# Altium PCB Slot.PcbDoc (part 2 of 4)
Units mm, origin at the board's own origin, x right, y up, seen from the top; angles counter-clockwise.
Board outline 152.4 x 101.6 mm, 2 copper layers (Top Layer, Bottom Layer); 34 components, 37 nets, 230 pads, 62 vias.
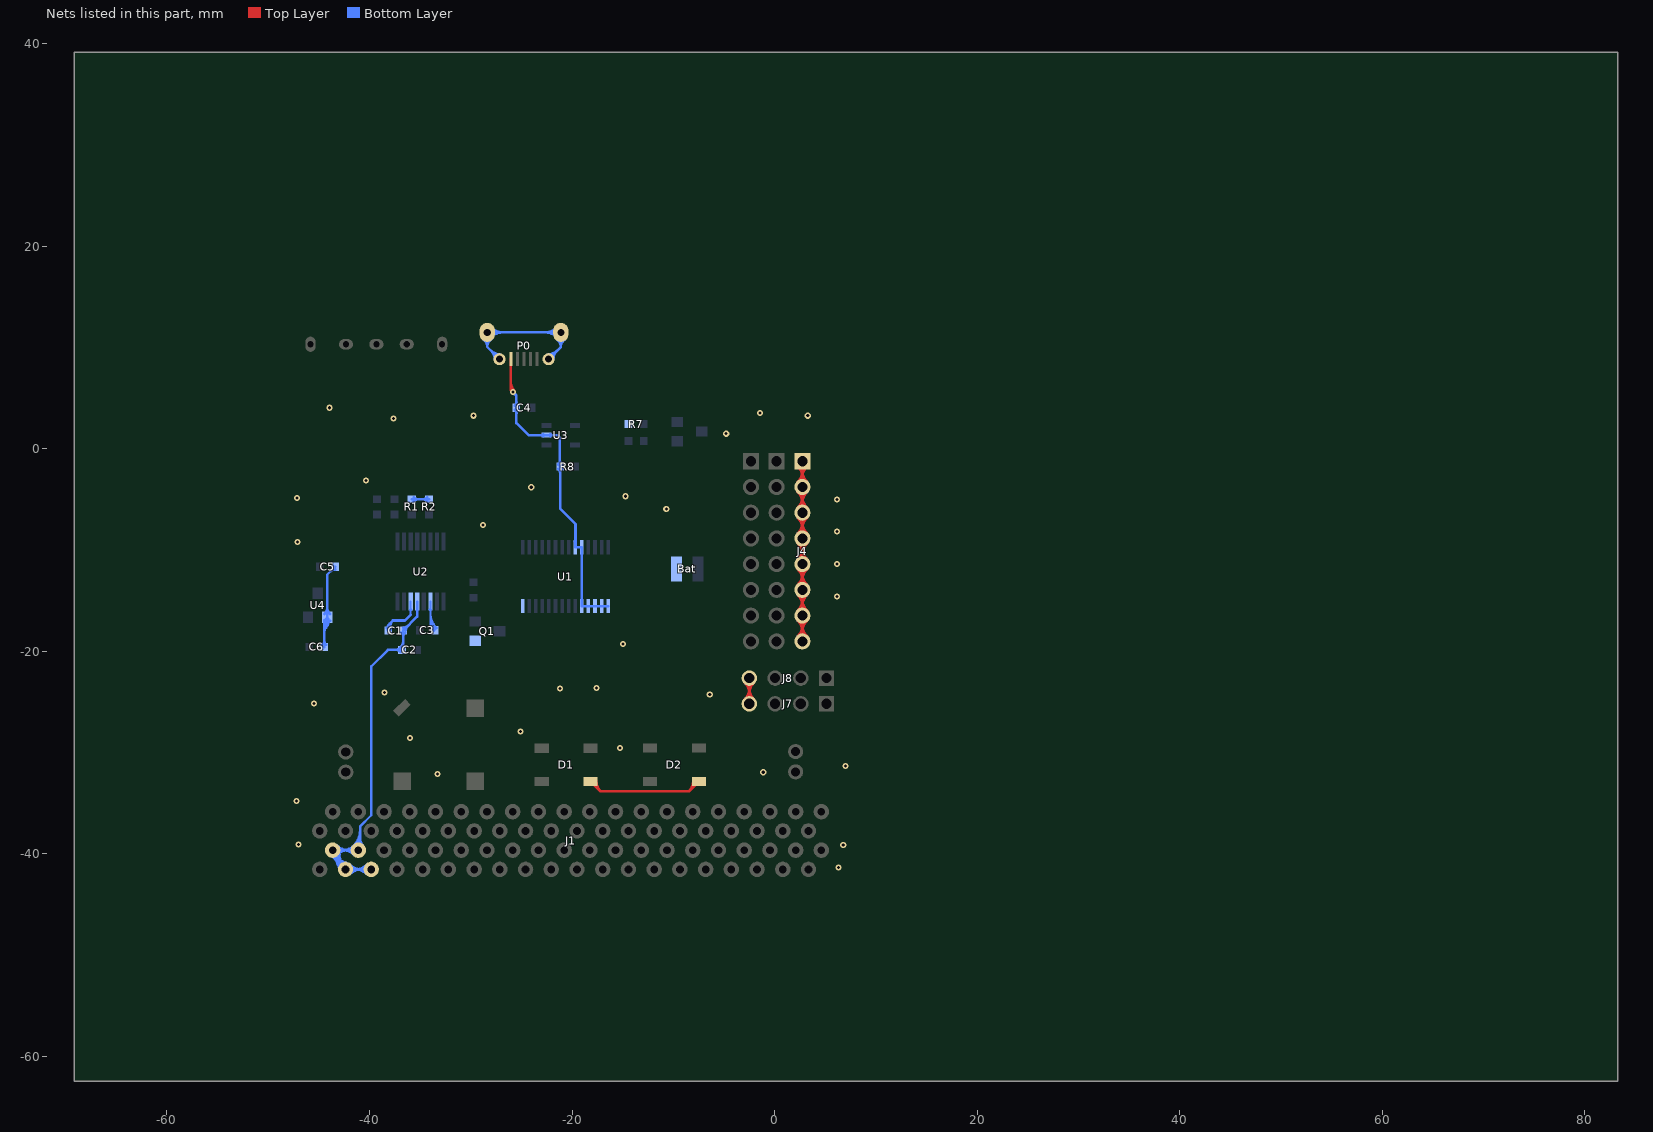
[diagram p2: the nets of this part, all layers, seen from the top]

## Via types
v1: diameter 0.6, hole 0.3, Top Layer to Bottom Layer, 62 vias

## Nets (pads, with @x,y where several pads share a name; then routed paths per layer and width w, separated by ;. In a path a pad name is that pad's centre, name@x,y a point inside that pad or via, vN(x,y) a via of type N, cw(c..) or ccw(c..) an arc to the next point about the centre after c; other vN are vias at no path point) (continued)
GND: Bat.2 C1.2 C2.1 C4.1 C5.1 C6.1 D1.3 D2.3 J1.71 J1.73 J1.75 J1.77 J4.1 J4.2 J4.3 J4.4 J4.5 J4.6 J4.7 J4.8 J7.4 J8.4 P0.5 P0.6 Q1.1 R1.2 R2.2 R7.1 R8.1 U1.1 U1.2 U1.3 U1.4 U1.5 U1.14 U1.23 U1.24 U2.13 U3.2 U4.1 | length 579.2
  Top Layer w0.254: P0.5@-26.035,8.865 -26.035,5.817 v1(-25.832,5.613) ; D1.3@-18.166,-32.835 -17.193,-33.807 ; D2.3@-7.472,-32.824 -8.456,-33.807 -17.193,-33.807 ; J7.4@-2.492,-25.171 J8.4@-2.492,-22.631 ; J4.8@2.743,-18.999 J4.7@2.743,-16.459 J4.6@2.743,-13.919 J4.5@2.743,-11.379 J4.4@2.743,-8.839 J4.3@2.743,-6.299 J4.2@2.743,-3.759 J4.1@2.743,-1.219 ; -26.035,5.908 ccw(c-25.537,5.908) v1@-25.889,5.556 ; -26.035,5.908 ccw(c-25.537,5.908) v1@-25.889,5.556 ; -26.035,5.908 ccw(c-25.537,5.908) v1@-25.889,5.556 ; -26.035,6.522 ccw(c-24.924,6.522) v1@-25.709,5.736 ; -26.035,6.522 ccw(c-24.924,6.522) v1@-25.709,5.736 ; -26.035,6.522 ccw(c-24.924,6.522) v1@-25.709,5.736 ; v1@-25.972,5.715 ccw(c-26.295,5.95) -25.949,6.15 ; v1@-25.972,5.715 ccw(c-26.295,5.95) -25.949,6.15 ; v1@-25.972,5.715 ccw(c-26.295,5.95) -25.949,6.15 ; D1.3@-17.944,-32.898 cw(c-18.35,-33.782) -17.409,-33.535 ; D1.3@-17.944,-32.898 cw(c-18.35,-33.782) -17.409,-33.535 ; D1.3@-17.944,-32.898 cw(c-18.35,-33.782) -17.409,-33.535 ; D1.3@-17.847,-32.835 ccw(c-17.086,-32.839) -17.624,-33.377 ; D1.3@-17.847,-32.835 ccw(c-17.086,-32.839) -17.624,-33.377 ; D1.3@-17.847,-32.835 ccw(c-17.086,-32.839) -17.624,-33.377 ; D1.3@-17.593,-32.837 ccw(c-16.229,-32.843) -17.193,-33.807 ; D1.3@-17.593,-32.837 ccw(c-16.229,-32.843) -17.193,-33.807 ; D1.3@-17.593,-32.837 ccw(c-16.229,-32.843) -17.193,-33.807 ; -8.45,-33.802 ccw(c-9.429,-32.824) D2.3@-8.045,-32.824 ; -8.45,-33.802 ccw(c-9.429,-32.824) D2.3@-8.045,-32.824 ; -8.45,-33.802 ccw(c-9.429,-32.824) D2.3@-8.045,-32.824 ; -8.232,-33.52 cw(c-7.295,-33.771) D2.3@-7.694,-32.887 ; -8.232,-33.52 cw(c-7.295,-33.771) D2.3@-7.694,-32.887 ; -8.232,-33.52 cw(c-7.295,-33.771) D2.3@-7.694,-32.887 ; -8.017,-33.369 ccw(c-8.561,-32.824) D2.3@-7.791,-32.824 ; -8.017,-33.369 ccw(c-8.561,-32.824) D2.3@-7.791,-32.824 ; -8.017,-33.369 ccw(c-8.561,-32.824) D2.3@-7.791,-32.824 ; J7.4@-2.941,-24.722 ccw(c-4.025,-23.638) -2.492,-23.638 ; J7.4@-2.941,-24.722 ccw(c-4.025,-23.638) -2.492,-23.638 ; J7.4@-2.941,-24.722 ccw(c-4.025,-23.638) -2.492,-23.638 ; J8.4@-2.941,-23.08 cw(c-4.025,-24.164) -2.492,-24.164 ; J8.4@-2.941,-23.08 cw(c-4.025,-24.164) -2.492,-24.164 ; J8.4@-2.941,-23.08 cw(c-4.025,-24.164) -2.492,-24.164 ; J7.4@-2.761,-24.902 ccw(c-3.411,-24.252) -2.492,-24.252 ; J7.4@-2.761,-24.902 ccw(c-3.411,-24.252) -2.492,-24.252 ; J7.4@-2.761,-24.902 ccw(c-3.411,-24.252) -2.492,-24.252 ; J8.4@-2.761,-22.901 cw(c-3.411,-23.551) -2.492,-23.551 ; J8.4@-2.761,-22.901 cw(c-3.411,-23.551) -2.492,-23.551 ; J8.4@-2.761,-22.901 cw(c-3.411,-23.551) -2.492,-23.551 ; -2.492,-24.252 ccw(c-1.572,-24.252) J7.4@-2.222,-24.902 ; -2.492,-24.252 ccw(c-1.572,-24.252) J7.4@-2.222,-24.902 ; -2.492,-24.252 ccw(c-1.572,-24.252) J7.4@-2.222,-24.902 ; -2.492,-24.164 cw(c-0.959,-24.164) J8.4@-2.043,-23.08 ; -2.492,-24.164 cw(c-0.959,-24.164) J8.4@-2.043,-23.08 ; -2.492,-24.164 cw(c-0.959,-24.164) J8.4@-2.043,-23.08 ; -2.492,-23.638 ccw(c-0.959,-23.638) J7.4@-2.043,-24.722 ; -2.492,-23.638 ccw(c-0.959,-23.638) J7.4@-2.043,-24.722 ; -2.492,-23.638 ccw(c-0.959,-23.638) J7.4@-2.043,-24.722 ; -2.492,-23.551 cw(c-1.572,-23.551) J8.4@-2.222,-22.901 ; -2.492,-23.551 cw(c-1.572,-23.551) J8.4@-2.222,-22.901 ; -2.492,-23.551 cw(c-1.572,-23.551) J8.4@-2.222,-22.901 ; J4.8@2.267,-18.523 ccw(c1.118,-17.374) 2.743,-17.374 ; J4.8@2.267,-18.523 ccw(c1.118,-17.374) 2.743,-17.374 ; J4.8@2.267,-18.523 ccw(c1.118,-17.374) 2.743,-17.374 ; J4.7@2.267,-16.935 cw(c1.118,-18.084) 2.743,-18.084 ; J4.7@2.267,-16.935 cw(c1.118,-18.084) 2.743,-18.084 ; J4.7@2.267,-16.935 cw(c1.118,-18.084) 2.743,-18.084 ; J4.7@2.267,-15.983 ccw(c1.118,-14.834) 2.743,-14.834 ; J4.7@2.267,-15.983 ccw(c1.118,-14.834) 2.743,-14.834 ; J4.7@2.267,-15.983 ccw(c1.118,-14.834) 2.743,-14.834 ; J4.6@2.267,-14.395 cw(c1.118,-15.544) 2.743,-15.544 ; J4.6@2.267,-14.395 cw(c1.118,-15.544) 2.743,-15.544 ; J4.6@2.267,-14.395 cw(c1.118,-15.544) 2.743,-15.544 ; J4.6@2.267,-13.443 ccw(c1.118,-12.294) 2.743,-12.294 ; J4.6@2.267,-13.443 ccw(c1.118,-12.294) 2.743,-12.294 ; J4.6@2.267,-13.443 ccw(c1.118,-12.294) 2.743,-12.294 ; J4.5@2.267,-11.855 cw(c1.118,-13.004) 2.743,-13.004 ; J4.5@2.267,-11.855 cw(c1.118,-13.004) 2.743,-13.004 ; J4.5@2.267,-11.855 cw(c1.118,-13.004) 2.743,-13.004 ; J4.5@2.267,-10.903 ccw(c1.118,-9.754) 2.743,-9.754 ; J4.5@2.267,-10.903 ccw(c1.118,-9.754) 2.743,-9.754 ; J4.5@2.267,-10.903 ccw(c1.118,-9.754) 2.743,-9.754 ; J4.4@2.267,-9.315 cw(c1.118,-10.464) 2.743,-10.464 ; J4.4@2.267,-9.315 cw(c1.118,-10.464) 2.743,-10.464 ; J4.4@2.267,-9.315 cw(c1.118,-10.464) 2.743,-10.464 ; J4.4@2.267,-8.363 ccw(c1.118,-7.214) 2.743,-7.214 ; J4.4@2.267,-8.363 ccw(c1.118,-7.214) 2.743,-7.214 ; J4.4@2.267,-8.363 ccw(c1.118,-7.214) 2.743,-7.214 ; J4.3@2.267,-6.775 cw(c1.118,-7.924) 2.743,-7.924 ; J4.3@2.267,-6.775 cw(c1.118,-7.924) 2.743,-7.924 ; J4.3@2.267,-6.775 cw(c1.118,-7.924) 2.743,-7.924 ; J4.3@2.267,-5.823 ccw(c1.118,-4.674) 2.743,-4.674 ; J4.3@2.267,-5.823 ccw(c1.118,-4.674) 2.743,-4.674 ; J4.3@2.267,-5.823 ccw(c1.118,-4.674) 2.743,-4.674 ; J4.2@2.267,-4.235 cw(c1.118,-5.384) 2.743,-5.384 ; J4.2@2.267,-4.235 cw(c1.118,-5.384) 2.743,-5.384 ; J4.2@2.267,-4.235 cw(c1.118,-5.384) 2.743,-5.384 ; J4.2@2.267,-3.283 ccw(c1.118,-2.134) 2.743,-2.134 ; J4.2@2.267,-3.283 ccw(c1.118,-2.134) 2.743,-2.134 ; J4.2@2.267,-3.283 ccw(c1.118,-2.134) 2.743,-2.134 ; J4.1@2.267,-1.695 cw(c1.118,-2.844) 2.743,-2.844 ; J4.1@2.267,-1.695 cw(c1.118,-2.844) 2.743,-2.844 ; J4.1@2.267,-1.695 cw(c1.118,-2.844) 2.743,-2.844 ; J4.8@2.447,-18.703 ccw(c1.732,-17.988) 2.743,-17.988 ; J4.8@2.447,-18.703 ccw(c1.732,-17.988) 2.743,-17.988 ; J4.8@2.447,-18.703 ccw(c1.732,-17.988) 2.743,-17.988 ; J4.7@2.447,-16.755 cw(c1.732,-17.471) 2.743,-17.471 ; J4.7@2.447,-16.755 cw(c1.732,-17.471) 2.743,-17.471 ; J4.7@2.447,-16.755 cw(c1.732,-17.471) 2.743,-17.471 ; J4.7@2.447,-16.163 ccw(c1.732,-15.448) 2.743,-15.448 ; J4.7@2.447,-16.163 ccw(c1.732,-15.448) 2.743,-15.448 ; J4.7@2.447,-16.163 ccw(c1.732,-15.448) 2.743,-15.448 ; J4.6@2.447,-14.215 cw(c1.732,-14.931) 2.743,-14.931 ; J4.6@2.447,-14.215 cw(c1.732,-14.931) 2.743,-14.931 ; J4.6@2.447,-14.215 cw(c1.732,-14.931) 2.743,-14.931 ; J4.6@2.447,-13.623 ccw(c1.732,-12.908) 2.743,-12.908 ; J4.6@2.447,-13.623 ccw(c1.732,-12.908) 2.743,-12.908 ; J4.6@2.447,-13.623 ccw(c1.732,-12.908) 2.743,-12.908 ; J4.5@2.447,-11.675 cw(c1.732,-12.391) 2.743,-12.391 ; J4.5@2.447,-11.675 cw(c1.732,-12.391) 2.743,-12.391 ; J4.5@2.447,-11.675 cw(c1.732,-12.391) 2.743,-12.391 ; J4.5@2.447,-11.083 ccw(c1.732,-10.368) 2.743,-10.368 ; J4.5@2.447,-11.083 ccw(c1.732,-10.368) 2.743,-10.368 ; J4.5@2.447,-11.083 ccw(c1.732,-10.368) 2.743,-10.368 ; J4.4@2.447,-9.135 cw(c1.732,-9.851) 2.743,-9.851 ; J4.4@2.447,-9.135 cw(c1.732,-9.851) 2.743,-9.851 ; J4.4@2.447,-9.135 cw(c1.732,-9.851) 2.743,-9.851 ; J4.4@2.447,-8.543 ccw(c1.732,-7.828) 2.743,-7.828 ; J4.4@2.447,-8.543 ccw(c1.732,-7.828) 2.743,-7.828 ; J4.4@2.447,-8.543 ccw(c1.732,-7.828) 2.743,-7.828 ; J4.3@2.447,-6.595 cw(c1.732,-7.311) 2.743,-7.311 ; J4.3@2.447,-6.595 cw(c1.732,-7.311) 2.743,-7.311 ; J4.3@2.447,-6.595 cw(c1.732,-7.311) 2.743,-7.311 ; J4.3@2.447,-6.003 ccw(c1.732,-5.288) 2.743,-5.288 ; J4.3@2.447,-6.003 ccw(c1.732,-5.288) 2.743,-5.288 ; J4.3@2.447,-6.003 ccw(c1.732,-5.288) 2.743,-5.288 ; J4.2@2.447,-4.055 cw(c1.732,-4.771) 2.743,-4.771 ; J4.2@2.447,-4.055 cw(c1.732,-4.771) 2.743,-4.771 ; J4.2@2.447,-4.055 cw(c1.732,-4.771) 2.743,-4.771 ; J4.2@2.447,-3.463 ccw(c1.732,-2.748) 2.743,-2.748 ; J4.2@2.447,-3.463 ccw(c1.732,-2.748) 2.743,-2.748 ; J4.2@2.447,-3.463 ccw(c1.732,-2.748) 2.743,-2.748 ; J4.1@2.447,-1.515 cw(c1.732,-2.231) 2.743,-2.231 ; J4.1@2.447,-1.515 cw(c1.732,-2.231) 2.743,-2.231 ; J4.1@2.447,-1.515 cw(c1.732,-2.231) 2.743,-2.231 ; 2.743,-18.084 cw(c4.368,-18.084) J4.7@3.219,-16.935 ; 2.743,-18.084 cw(c4.368,-18.084) J4.7@3.219,-16.935 ; 2.743,-18.084 cw(c4.368,-18.084) J4.7@3.219,-16.935 ; 2.743,-17.988 ccw(c3.755,-17.988) J4.8@3.039,-18.703 ; 2.743,-17.988 ccw(c3.755,-17.988) J4.8@3.039,-18.703 ; 2.743,-17.988 ccw(c3.755,-17.988) J4.8@3.039,-18.703 ; 2.743,-17.471 cw(c3.755,-17.471) J4.7@3.039,-16.755 ; 2.743,-17.471 cw(c3.755,-17.471) J4.7@3.039,-16.755 ; 2.743,-17.471 cw(c3.755,-17.471) J4.7@3.039,-16.755 ; 2.743,-17.374 ccw(c4.368,-17.374) J4.8@3.219,-18.523 ; 2.743,-17.374 ccw(c4.368,-17.374) J4.8@3.219,-18.523 ; 2.743,-17.374 ccw(c4.368,-17.374) J4.8@3.219,-18.523 ; 2.743,-15.544 cw(c4.368,-15.544) J4.6@3.219,-14.395 ; 2.743,-15.544 cw(c4.368,-15.544) J4.6@3.219,-14.395 ; 2.743,-15.544 cw(c4.368,-15.544) J4.6@3.219,-14.395 ; 2.743,-15.448 ccw(c3.755,-15.448) J4.7@3.039,-16.163 ; 2.743,-15.448 ccw(c3.755,-15.448) J4.7@3.039,-16.163 ; 2.743,-15.448 ccw(c3.755,-15.448) J4.7@3.039,-16.163 ; 2.743,-14.931 cw(c3.755,-14.931) J4.6@3.039,-14.215 ; 2.743,-14.931 cw(c3.755,-14.931) J4.6@3.039,-14.215 ; 2.743,-14.931 cw(c3.755,-14.931) J4.6@3.039,-14.215 ; 2.743,-14.834 ccw(c4.368,-14.834) J4.7@3.219,-15.983 ; 2.743,-14.834 ccw(c4.368,-14.834) J4.7@3.219,-15.983 ; 2.743,-14.834 ccw(c4.368,-14.834) J4.7@3.219,-15.983 ; 2.743,-13.004 cw(c4.368,-13.004) J4.5@3.219,-11.855 ; 2.743,-13.004 cw(c4.368,-13.004) J4.5@3.219,-11.855 ; 2.743,-13.004 cw(c4.368,-13.004) J4.5@3.219,-11.855 ; 2.743,-12.908 ccw(c3.755,-12.908) J4.6@3.039,-13.623 ; 2.743,-12.908 ccw(c3.755,-12.908) J4.6@3.039,-13.623 ; 2.743,-12.908 ccw(c3.755,-12.908) J4.6@3.039,-13.623 ; 2.743,-12.391 cw(c3.755,-12.391) J4.5@3.039,-11.675 ; 2.743,-12.391 cw(c3.755,-12.391) J4.5@3.039,-11.675 ; 2.743,-12.391 cw(c3.755,-12.391) J4.5@3.039,-11.675 ; 2.743,-12.294 ccw(c4.368,-12.294) J4.6@3.219,-13.443 ; 2.743,-12.294 ccw(c4.368,-12.294) J4.6@3.219,-13.443 ; 2.743,-12.294 ccw(c4.368,-12.294) J4.6@3.219,-13.443 ; 2.743,-10.464 cw(c4.368,-10.464) J4.4@3.219,-9.315 ; 2.743,-10.464 cw(c4.368,-10.464) J4.4@3.219,-9.315 ; 2.743,-10.464 cw(c4.368,-10.464) J4.4@3.219,-9.315 ; 2.743,-10.368 ccw(c3.755,-10.368) J4.5@3.039,-11.083 ; 2.743,-10.368 ccw(c3.755,-10.368) J4.5@3.039,-11.083 ; 2.743,-10.368 ccw(c3.755,-10.368) J4.5@3.039,-11.083 ; 2.743,-9.851 cw(c3.755,-9.851) J4.4@3.039,-9.135 ; 2.743,-9.851 cw(c3.755,-9.851) J4.4@3.039,-9.135 ; 2.743,-9.851 cw(c3.755,-9.851) J4.4@3.039,-9.135 ; 2.743,-9.754 ccw(c4.368,-9.754) J4.5@3.219,-10.903 ; 2.743,-9.754 ccw(c4.368,-9.754) J4.5@3.219,-10.903 ; 2.743,-9.754 ccw(c4.368,-9.754) J4.5@3.219,-10.903 ; 2.743,-7.924 cw(c4.368,-7.924) J4.3@3.219,-6.775 ; 2.743,-7.924 cw(c4.368,-7.924) J4.3@3.219,-6.775 ; 2.743,-7.924 cw(c4.368,-7.924) J4.3@3.219,-6.775 ; 2.743,-7.828 ccw(c3.755,-7.828) J4.4@3.039,-8.543 ; 2.743,-7.828 ccw(c3.755,-7.828) J4.4@3.039,-8.543 ; 2.743,-7.828 ccw(c3.755,-7.828) J4.4@3.039,-8.543 ; 2.743,-7.311 cw(c3.755,-7.311) J4.3@3.039,-6.595 ; 2.743,-7.311 cw(c3.755,-7.311) J4.3@3.039,-6.595 ; 2.743,-7.311 cw(c3.755,-7.311) J4.3@3.039,-6.595 ; 2.743,-7.214 ccw(c4.368,-7.214) J4.4@3.219,-8.363 ; 2.743,-7.214 ccw(c4.368,-7.214) J4.4@3.219,-8.363 ; 2.743,-7.214 ccw(c4.368,-7.214) J4.4@3.219,-8.363 ; 2.743,-5.384 cw(c4.368,-5.384) J4.2@3.219,-4.235 ; 2.743,-5.384 cw(c4.368,-5.384) J4.2@3.219,-4.235 ; 2.743,-5.384 cw(c4.368,-5.384) J4.2@3.219,-4.235 ; 2.743,-5.288 ccw(c3.755,-5.288) J4.3@3.039,-6.003 ; 2.743,-5.288 ccw(c3.755,-5.288) J4.3@3.039,-6.003 ; 2.743,-5.288 ccw(c3.755,-5.288) J4.3@3.039,-6.003 ; 2.743,-4.771 cw(c3.755,-4.771) J4.2@3.039,-4.055 ; 2.743,-4.771 cw(c3.755,-4.771) J4.2@3.039,-4.055 ; 2.743,-4.771 cw(c3.755,-4.771) J4.2@3.039,-4.055 ; 2.743,-4.674 ccw(c4.368,-4.674) J4.3@3.219,-5.823 ; 2.743,-4.674 ccw(c4.368,-4.674) J4.3@3.219,-5.823 ; 2.743,-4.674 ccw(c4.368,-4.674) J4.3@3.219,-5.823 ; 2.743,-2.844 cw(c4.368,-2.844) J4.1@3.219,-1.695 ; 2.743,-2.844 cw(c4.368,-2.844) J4.1@3.219,-1.695 ; 2.743,-2.844 cw(c4.368,-2.844) J4.1@3.219,-1.695 ; 2.743,-2.748 ccw(c3.755,-2.748) J4.2@3.039,-3.463 ; 2.743,-2.748 ccw(c3.755,-2.748) J4.2@3.039,-3.463 ; 2.743,-2.748 ccw(c3.755,-2.748) J4.2@3.039,-3.463 ; 2.743,-2.231 cw(c3.755,-2.231) J4.1@3.039,-1.515 ; 2.743,-2.231 cw(c3.755,-2.231) J4.1@3.039,-1.515 ; 2.743,-2.231 cw(c3.755,-2.231) J4.1@3.039,-1.515 ; 2.743,-2.134 ccw(c4.368,-2.134) J4.2@3.219,-3.283 ; 2.743,-2.134 ccw(c4.368,-2.134) J4.2@3.219,-3.283 ; 2.743,-2.134 ccw(c4.368,-2.134) J4.2@3.219,-3.283
  Bottom Layer w0.254: C6.1@-44.462,-19.558 -44.462,-16.928 U4.1@-44.171,-16.637 -44.171,-12.409 C5.1@-43.395,-11.633 ; -42.965,-40.63 cw(c-43.243,-41.342) J1.75@-42.494,-41.495 ; -42.684,-40.74 cw(c-42.943,-41.403) J1.75@-42.245,-41.547 ; J1.71@-39.83,-41.521 J1.75@-42.37,-41.521 -43.64,-40.251 J1.77@-43.64,-39.621 J1.73@-41.1,-39.621 -40.922,-39.443 -40.922,-37.269 -39.827,-36.174 -39.827,-21.488 -38.176,-19.837 C2.1@-36.793,-19.837 -36.664,-19.709 C1.2@-36.664,-17.932 -35.286,-16.555 U2.13@-35.286,-15.084 ; R1.2@-35.827,-4.977 R2.2@-34.112,-4.977 ; P0.6@-27.165,8.865 -28.372,10.071 ; v1(-25.832,5.613) -25.49,5.271 C4.1@-25.49,4.064 -25.49,2.553 -24.293,1.356 U3.2@-22.504,1.356 -21.448,1.356 -21.209,1.118 -21.209,-1.727 R8.1@-21.184,-1.753 -21.184,-5.893 -19.66,-7.417 -19.66,-9.695 U1.23@-19.684,-9.719 U1.24@-19.034,-9.719 U1.5@-19.034,-15.519 U1.4@-18.384,-15.519 U1.3@-17.734,-15.519 U1.2@-17.084,-15.519 U1.1@-16.434,-15.519 ; P0.6@-22.314,8.865 -21.107,10.071 ; C6.1@-44.637,-19.358 ccw(c-45.061,-18.934) -44.462,-18.934 ; C6.1@-44.637,-19.358 ccw(c-45.061,-18.934) -44.462,-18.934 ; C6.1@-44.637,-19.358 ccw(c-45.061,-18.934) -44.462,-18.934 ; -44.462,-18.934 ccw(c-43.863,-18.934) C6.1@-44.287,-19.358 ; -44.462,-18.934 ccw(c-43.863,-18.934) C6.1@-44.287,-19.358 ; -44.462,-18.934 ccw(c-43.863,-18.934) C6.1@-44.287,-19.358 ; -44.462,-18.324 cw(c-42.547,-18.324) U4.1@-43.901,-16.97 ; -44.462,-18.324 cw(c-42.547,-18.324) U4.1@-43.901,-16.97 ; -44.462,-18.324 cw(c-42.547,-18.324) U4.1@-43.901,-16.97 ; -44.462,-17.711 cw(c-43.16,-17.711) U4.1@-44.081,-16.79 ; -44.462,-17.711 cw(c-43.16,-17.711) U4.1@-44.081,-16.79 ; -44.462,-17.711 cw(c-43.16,-17.711) U4.1@-44.081,-16.79 ; U4.1@-44.44,-16.304 ccw(c-45.09,-15.654) -44.171,-15.654 ; U4.1@-44.44,-16.304 ccw(c-45.09,-15.654) -44.171,-15.654 ; U4.1@-44.44,-16.304 ccw(c-45.09,-15.654) -44.171,-15.654 ; U4.1@-44.432,-16.978 cw(c-44.618,-17.176) -44.382,-17.312 ; U4.1@-44.432,-16.978 cw(c-44.618,-17.176) -44.382,-17.312 ; U4.1@-44.432,-16.978 cw(c-44.618,-17.176) -44.382,-17.312 ; U4.1@-44.41,-16.997 cw(c-44.73,-17.391) -44.291,-17.644 ; U4.1@-44.41,-16.997 cw(c-44.73,-17.391) -44.291,-17.644 ; U4.1@-44.41,-16.997 cw(c-44.73,-17.391) -44.291,-17.644 ; -44.376,-17.302 cw(c-43.942,-17.552) U4.1@-44.072,-17.069 ; -44.376,-17.302 cw(c-43.942,-17.552) U4.1@-44.072,-17.069 ; -44.376,-17.302 cw(c-43.942,-17.552) U4.1@-44.072,-17.069 ; U4.1@-44.251,-16.799 cw(c-44.54,-17.157) -44.142,-17.387 ; U4.1@-44.251,-16.799 cw(c-44.54,-17.157) -44.142,-17.387 ; U4.1@-44.251,-16.799 cw(c-44.54,-17.157) -44.142,-17.387 ; -44.171,-15.654 ccw(c-43.251,-15.654) U4.1@-43.901,-16.304 ; -44.171,-15.654 ccw(c-43.251,-15.654) U4.1@-43.901,-16.304 ; -44.171,-15.654 ccw(c-43.251,-15.654) U4.1@-43.901,-16.304 ; -43.861,-12.099 cw(c-43.395,-12.565) C5.1@-43.395,-11.906 ; -43.861,-12.099 cw(c-43.395,-12.565) C5.1@-43.395,-11.906 ; -43.861,-12.099 cw(c-43.395,-12.565) C5.1@-43.395,-11.906 ; -43.801,-12.039 ccw(c-44.182,-11.658) C5.1@-43.643,-11.658 ; -43.801,-12.039 ccw(c-44.182,-11.658) C5.1@-43.643,-11.658 ; -43.801,-12.039 ccw(c-44.182,-11.658) C5.1@-43.643,-11.658 ; J1.77@-43.766,-39.607 ccw(c-42.8,-39.716) -43.487,-40.403 ; J1.77@-43.766,-39.607 ccw(c-42.8,-39.716) -43.487,-40.403 ; J1.77@-43.766,-39.607 ccw(c-42.8,-39.716) -43.487,-40.403 ; J1.77@-43.709,-39.727 cw(c-44.447,-40.858) -43.112,-40.657 ; J1.77@-43.709,-39.727 cw(c-44.447,-40.858) -43.112,-40.657 ; J1.77@-43.709,-39.727 cw(c-44.447,-40.858) -43.112,-40.657 ; J1.77@-43.64,-40.256 cw(c-43.64,-41.166) -42.996,-40.522 ; J1.77@-43.64,-40.256 cw(c-43.64,-41.166) -42.996,-40.522 ; J1.77@-43.64,-40.256 cw(c-43.64,-41.166) -42.996,-40.522 ; J1.77@-43.64,-40.256 cw(c-43.64,-41.166) -42.996,-40.522 ; J1.77@-43.564,-39.519 cw(c-44.627,-40.956) -42.859,-40.691 ; J1.77@-43.564,-39.519 cw(c-44.627,-40.956) -42.859,-40.691 ; J1.77@-43.564,-39.519 cw(c-44.627,-40.956) -42.859,-40.691 ; J1.77@-43.513,-39.635 ccw(c-42.131,-39.792) -43.115,-40.776 ; J1.77@-43.513,-39.635 ccw(c-42.131,-39.792) -43.115,-40.776 ; J1.77@-43.513,-39.635 ccw(c-42.131,-39.792) -43.115,-40.776 ; -43.454,-40.437 ccw(c-42.37,-39.353) J1.75@-42.37,-40.886 ; -43.454,-40.437 cw(c-44.538,-41.521) J1.75@-43.005,-41.521 ; -43.454,-40.437 ccw(c-42.37,-39.353) J1.75@-42.37,-40.886 ; -43.454,-40.437 cw(c-44.538,-41.521) J1.75@-43.005,-41.521 ; -43.454,-40.437 ccw(c-42.37,-39.353) J1.75@-42.37,-40.886 ; -43.454,-40.437 cw(c-44.538,-41.521) J1.75@-43.005,-41.521 ; J1.77@-43.413,-39.315 cw(c-44.111,-40.259) -42.95,-40.085 ; J1.77@-43.413,-39.315 cw(c-44.111,-40.259) -42.95,-40.085 ; J1.77@-43.413,-39.315 cw(c-44.111,-40.259) -42.95,-40.085 ; J1.77@-43.37,-39.89 cw(c-42.72,-40.541) -42.72,-39.621 ; J1.77@-43.37,-39.89 cw(c-42.72,-40.541) -42.72,-39.621 ; J1.77@-43.37,-39.89 cw(c-42.72,-40.541) -42.72,-39.621 ; J1.77@-43.37,-39.352 ccw(c-42.72,-38.701) -42.72,-39.621 ; J1.77@-43.37,-39.352 ccw(c-42.72,-38.701) -42.72,-39.621 ; J1.77@-43.37,-39.352 ccw(c-42.72,-38.701) -42.72,-39.621 ; J1.77@-43.274,-39.727 ccw(c-42.593,-39.924) -43.094,-40.425 ; J1.77@-43.274,-39.727 ccw(c-42.593,-39.924) -43.094,-40.425 ; J1.77@-43.274,-39.727 ccw(c-42.593,-39.924) -43.094,-40.425 ; J1.77@-43.274,-39.727 ccw(c-42.593,-39.924) -43.094,-40.425 ; J1.77@-43.261,-39.664 ccw(c-41.462,-39.868) J1.75@-42.742,-41.148 ; J1.77@-43.261,-39.664 ccw(c-41.462,-39.868) J1.75@-42.742,-41.148 ; J1.77@-43.261,-39.664 ccw(c-41.462,-39.868) J1.75@-42.742,-41.148 ; J1.77@-43.25,-40.269 ccw(c-42.161,-39.64) J1.75@-42.3,-40.89 ; J1.77@-43.25,-40.269 ccw(c-42.161,-39.64) J1.75@-42.3,-40.89 ; J1.77@-43.25,-40.269 ccw(c-42.161,-39.64) J1.75@-42.3,-40.89 ; J1.77@-43.191,-40.07 cw(c-42.107,-41.154) -42.107,-39.621 ; J1.77@-43.191,-40.07 cw(c-42.107,-41.154) -42.107,-39.621 ; J1.77@-43.191,-40.07 cw(c-42.107,-41.154) -42.107,-39.621 ; J1.77@-43.191,-39.172 ccw(c-42.107,-38.088) -42.107,-39.621 ; J1.77@-43.191,-39.172 ccw(c-42.107,-38.088) -42.107,-39.621 ; J1.77@-43.191,-39.172 ccw(c-42.107,-38.088) -42.107,-39.621 ; -43.166,-40.919 ccw(c-42.193,-40.659) J1.75@-42.395,-41.645 ; -43.166,-40.919 ccw(c-42.193,-40.659) J1.75@-42.395,-41.645 ; -43.166,-40.919 ccw(c-42.193,-40.659) J1.75@-42.395,-41.645 ; -43.09,-40.547 cw(c-44.014,-41.08) J1.75@-42.983,-41.357 ; -43.09,-40.547 cw(c-44.014,-41.08) J1.75@-42.983,-41.357 ; -43.09,-40.547 cw(c-44.014,-41.08) J1.75@-42.983,-41.357 ; J1.77@-43.03,-39.797 ccw(c-42.121,-40.06) -42.79,-40.729 ; J1.77@-43.03,-39.797 ccw(c-42.121,-40.06) -42.79,-40.729 ; J1.77@-43.03,-39.797 ccw(c-42.121,-40.06) -42.79,-40.729 ; J1.77@-43.03,-39.797 ccw(c-42.121,-40.06) -42.79,-40.729 ; -43.02,-40.871 ccw(c-42.37,-40.22) J1.75@-42.37,-41.14 ; -43.02,-40.871 cw(c-43.67,-41.521) J1.75@-42.751,-41.521 ; -43.02,-40.871 ccw(c-42.37,-40.22) J1.75@-42.37,-41.14 ; -43.02,-40.871 cw(c-43.67,-41.521) J1.75@-42.751,-41.521 ; -43.02,-40.871 ccw(c-42.37,-40.22) J1.75@-42.37,-41.14 ; -43.02,-40.871 cw(c-43.67,-41.521) J1.75@-42.751,-41.521 ; J1.77@-43.009,-39.693 ccw(c-40.793,-39.944) J1.75@-42.37,-41.521 ; J1.77@-43.009,-39.693 ccw(c-40.793,-39.944) J1.75@-42.37,-41.521 ; J1.77@-43.009,-39.693 ccw(c-40.793,-39.944) J1.75@-42.37,-41.521 ; -42.999,-40.703 ccw(c-42.229,-40.259) J1.75@-42.328,-41.142 ; -42.999,-40.703 ccw(c-42.229,-40.259) J1.75@-42.328,-41.142 ; -42.999,-40.703 ccw(c-42.229,-40.259) J1.75@-42.328,-41.142 ; -42.971,-40.725 cw(c-43.232,-41.698) J1.75@-42.245,-41.496 ; -42.971,-40.725 cw(c-43.232,-41.698) J1.75@-42.245,-41.496 ; -42.971,-40.725 cw(c-43.232,-41.698) J1.75@-42.245,-41.496 ; -42.947,-40.521 ccw(c-42.313,-40.155) J1.75@-42.343,-40.887 ; -42.947,-40.521 cw(c-43.581,-40.887) J1.75@-42.932,-41.227 ; -42.947,-40.521 ccw(c-42.313,-40.155) J1.75@-42.343,-40.887 ; -42.947,-40.521 cw(c-43.581,-40.887) J1.75@-42.932,-41.227 ; -42.947,-40.521 ccw(c-42.313,-40.155) J1.75@-42.343,-40.887 ; -42.947,-40.521 cw(c-43.581,-40.887) J1.75@-42.932,-41.227 ; -42.633,-39.621 ccw(c-42.633,-38.088) J1.73@-41.549,-39.172 ; -42.633,-39.621 cw(c-42.633,-41.154) J1.73@-41.549,-40.07 ; -42.633,-39.621 ccw(c-42.633,-38.088) J1.73@-41.549,-39.172 ; -42.633,-39.621 cw(c-42.633,-41.154) J1.73@-41.549,-40.07 ; -42.633,-39.621 ccw(c-42.633,-38.088) J1.73@-41.549,-39.172 ; -42.633,-39.621 cw(c-42.633,-41.154) J1.73@-41.549,-40.07 ; J1.75@-42.1,-41.79 cw(c-41.45,-42.441) -41.45,-41.521 ; J1.75@-42.1,-41.79 cw(c-41.45,-42.441) -41.45,-41.521 ; J1.75@-42.1,-41.79 cw(c-41.45,-42.441) -41.45,-41.521 ; J1.75@-42.1,-41.252 ccw(c-41.45,-40.601) -41.45,-41.521 ; J1.75@-42.1,-41.252 ccw(c-41.45,-40.601) -41.45,-41.521 ; J1.75@-42.1,-41.252 ccw(c-41.45,-40.601) -41.45,-41.521 ; -42.019,-39.621 ccw(c-42.019,-38.701) J1.73@-41.369,-39.352 ; -42.019,-39.621 cw(c-42.019,-40.541) J1.73@-41.369,-39.89 ; -42.019,-39.621 ccw(c-42.019,-38.701) J1.73@-41.369,-39.352 ; -42.019,-39.621 cw(c-42.019,-40.541) J1.73@-41.369,-39.89 ; -42.019,-39.621 ccw(c-42.019,-38.701) J1.73@-41.369,-39.352 ; -42.019,-39.621 cw(c-42.019,-40.541) J1.73@-41.369,-39.89 ; J1.75@-41.921,-41.97 cw(c-40.837,-43.054) -40.837,-41.521 ; J1.75@-41.921,-41.97 cw(c-40.837,-43.054) -40.837,-41.521 ; J1.75@-41.921,-41.97 cw(c-40.837,-43.054) -40.837,-41.521 ; J1.75@-41.921,-41.072 ccw(c-40.837,-39.988) -40.837,-41.521 ; J1.75@-41.921,-41.072 ccw(c-40.837,-39.988) -40.837,-41.521 ; J1.75@-41.921,-41.072 ccw(c-40.837,-39.988) -40.837,-41.521 ; J1.73@-41.549,-39.172 ccw(c-43.062,-37.658) -40.922,-37.658 ; J1.73@-41.549,-39.172 ccw(c-43.062,-37.658) -40.922,-37.658 ; J1.73@-41.549,-39.172 ccw(c-43.062,-37.658) -40.922,-37.658 ; J1.73@-41.369,-39.352 ccw(c-42.449,-38.271) -40.922,-38.271 ; J1.73@-41.369,-39.352 ccw(c-42.449,-38.271) -40.922,-38.271 ; J1.73@-41.369,-39.352 ccw(c-42.449,-38.271) -40.922,-38.271 ; -41.363,-41.521 ccw(c-41.363,-39.988) J1.71@-40.279,-41.072 ; -41.363,-41.521 cw(c-41.363,-43.054) J1.71@-40.279,-41.97 ; -41.363,-41.521 ccw(c-41.363,-39.988) J1.71@-40.279,-41.072 ; -41.363,-41.521 cw(c-41.363,-43.054) J1.71@-40.279,-41.97 ; -41.363,-41.521 ccw(c-41.363,-39.988) J1.71@-40.279,-41.072 ; -41.363,-41.521 cw(c-41.363,-43.054) J1.71@-40.279,-41.97 ; -40.922,-38.518 ccw(c-39.996,-38.518) J1.73@-40.651,-39.172 ; -40.922,-38.518 ccw(c-39.996,-38.518) J1.73@-40.651,-39.172 ; -40.922,-38.518 ccw(c-39.996,-38.518) J1.73@-40.651,-39.172 ; -40.749,-41.521 ccw(c-40.749,-40.601) J1.71@-40.099,-41.252 ; -40.749,-41.521 cw(c-40.749,-42.441) J1.71@-40.099,-41.79 ; -40.749,-41.521 ccw(c-40.749,-40.601) J1.71@-40.099,-41.252 ; -40.749,-41.521 cw(c-40.749,-42.441) J1.71@-40.099,-41.79 ; -40.749,-41.521 ccw(c-40.749,-40.601) J1.71@-40.099,-41.252 ; -40.749,-41.521 cw(c-40.749,-42.441) J1.71@-40.099,-41.79 ; -37.391,-19.837 ccw(c-37.391,-19.239) C2.1@-36.968,-19.662 ; -37.391,-19.837 cw(c-37.391,-20.436) C2.1@-36.968,-20.013 ; -37.391,-19.837 ccw(c-37.391,-19.239) C2.1@-36.968,-19.662 ; -37.391,-19.837 cw(c-37.391,-20.436) C2.1@-36.968,-20.013 ; -37.391,-19.837 ccw(c-37.391,-19.239) C2.1@-36.968,-19.662 ; -37.391,-19.837 cw(c-37.391,-20.436) C2.1@-36.968,-20.013 ; C2.1@-36.968,-19.637 ccw(c-37.701,-18.904) -36.664,-18.904 ; C2.1@-36.968,-19.637 ccw(c-37.701,-18.904) -36.664,-18.904 ; C2.1@-36.968,-19.637 ccw(c-37.701,-18.904) -36.664,-18.904 ; C1.2@-36.84,-18.133 cw(c-37.263,-18.556) -36.664,-18.556 ; C1.2@-36.84,-18.133 cw(c-37.263,-18.556) -36.664,-18.556 ; C1.2@-36.84,-18.133 cw(c-37.263,-18.556) -36.664,-18.556 ; -36.664,-18.556 cw(c-36.065,-18.556) C1.2@-36.489,-18.133 ; -36.664,-18.556 cw(c-36.065,-18.556) C1.2@-36.489,-18.133 ; -36.664,-18.556 cw(c-36.065,-18.556) C1.2@-36.489,-18.133 ; C1.2@-36.664,-17.659 ccw(c-36.664,-17) -36.198,-17.466 ; C1.2@-36.664,-17.659 ccw(c-36.664,-17) -36.198,-17.466 ; C1.2@-36.664,-17.659 ccw(c-36.664,-17) -36.198,-17.466 ; C1.2@-36.416,-17.907 cw(c-35.878,-17.907) -36.259,-17.527 ; C1.2@-36.416,-17.907 cw(c-35.878,-17.907) -36.259,-17.527 ; C1.2@-36.416,-17.907 cw(c-35.878,-17.907) -36.259,-17.527 ; R1.2@-35.626,-5.152 cw(c-35.203,-5.576) -35.203,-4.977 ; R1.2@-35.626,-5.152 cw(c-35.203,-5.576) -35.203,-4.977 ; R1.2@-35.626,-5.152 cw(c-35.203,-5.576) -35.203,-4.977 ; R1.2@-35.626,-4.802 ccw(c-35.203,-4.378) -35.203,-4.977 ; R1.2@-35.626,-4.802 ccw(c-35.203,-4.378) -35.203,-4.977 ; R1.2@-35.626,-4.802 ccw(c-35.203,-4.378) -35.203,-4.977 ; -34.736,-4.977 ccw(c-34.736,-4.378) R2.2@-34.313,-4.802 ; -34.736,-4.977 cw(c-34.736,-5.576) R2.2@-34.313,-5.152 ; -34.736,-4.977 ccw(c-34.736,-4.378) R2.2@-34.313,-4.802 ; -34.736,-4.977 cw(c-34.736,-5.576) R2.2@-34.313,-5.152 ; -34.736,-4.977 ccw(c-34.736,-4.378) R2.2@-34.313,-4.802 ; -34.736,-4.977 cw(c-34.736,-5.576) R2.2@-34.313,-5.152 ; P0.6@-28.742,10.805 cw(c-29.284,10.071) -28.372,10.071 ; P0.6@-28.742,10.805 cw(c-29.284,10.071) -28.372,10.071 ; P0.6@-28.742,10.805 cw(c-29.284,10.071) -28.372,10.071 ; -28.372,10.071 cw(c-27.459,10.071) P0.6@-28.002,10.805 ; -28.372,10.071 cw(c-27.459,10.071) P0.6@-28.002,10.805 ; -28.372,10.071 cw(c-27.459,10.071) P0.6@-28.002,10.805 ; -28.372,10.071 P0.6@-28.372,11.506 P0.6@-21.107,11.506 -21.107,10.071 ; P0.6@-28.111,11.245 cw(c-27.481,10.615) -27.481,11.506 ; P0.6@-28.111,11.245 cw(c-27.481,10.615) -27.481,11.506 ; P0.6@-28.111,11.245 cw(c-27.481,10.615) -27.481,11.506 ; P0.6@-28.111,11.767 ccw(c-27.481,12.397) -27.481,11.506 ; P0.6@-28.111,11.767 ccw(c-27.481,12.397) -27.481,11.506 ; P0.6@-28.111,11.767 ccw(c-27.481,12.397) -27.481,11.506 ; -27.973,9.672 ccw(c-27.165,10.48) P0.6@-27.165,9.338 ; -27.973,9.672 cw(c-28.78,8.865) P0.6@-27.638,8.865 ; -27.973,9.672 ccw(c-27.165,10.48) P0.6@-27.165,9.338 ; -27.973,9.672 cw(c-28.78,8.865) P0.6@-27.638,8.865 ; -27.973,9.672 ccw(c-27.165,10.48) P0.6@-27.165,9.338 ; -27.973,9.672 cw(c-28.78,8.865) P0.6@-27.638,8.865 ; P0.6@-27.931,11.066 cw(c-26.868,10.002) -26.868,11.506 ; P0.6@-27.931,11.066 cw(c-26.868,10.002) -26.868,11.506 ; P0.6@-27.931,11.066 cw(c-26.868,10.002) -26.868,11.506 ; P0.6@-27.931,11.947 ccw(c-26.868,13.01) -26.868,11.506 ; P0.6@-27.931,11.947 ccw(c-26.868,13.01) -26.868,11.506 ; P0.6@-27.931,11.947 ccw(c-26.868,13.01) -26.868,11.506 ; -27.783,9.406 ccw(c-27.012,9.612) P0.6@-27.172,8.83 ; -27.783,9.406 ccw(c-27.012,9.612) P0.6@-27.172,8.83 ; -27.783,9.406 ccw(c-27.012,9.612) P0.6@-27.172,8.83 ; -27.707,9.483 cw(c-27.913,8.711) P0.6@-27.131,8.872 ; -27.707,9.483 cw(c-27.913,8.711) P0.6@-27.131,8.872 ; -27.707,9.483 cw(c-27.913,8.711) P0.6@-27.131,8.872 ; v1@-25.832,5.44 cw(c-25.832,5.023) -25.536,5.318 ; v1@-25.832,5.44 cw(c-25.832,5.023) -25.536,5.318 ; v1@-25.832,5.44 cw(c-25.832,5.023) -25.536,5.318 ; C4.1@-25.665,3.864 cw(c-26.088,3.44) -25.49,3.44 ; C4.1@-25.665,3.864 cw(c-26.088,3.44) -25.49,3.44 ; C4.1@-25.665,3.864 cw(c-26.088,3.44) -25.49,3.44 ; C4.1@-25.665,4.264 ccw(c-26.088,4.688) -25.49,4.688 ; C4.1@-25.665,4.264 ccw(c-26.088,4.688) -25.49,4.688 ; C4.1@-25.665,4.264 ccw(c-26.088,4.688) -25.49,4.688 ; v1@-25.659,5.613 ccw(c-25.241,5.613) -25.536,5.318 ; v1@-25.659,5.613 ccw(c-25.241,5.613) -25.536,5.318 ; v1@-25.659,5.613 ccw(c-25.241,5.613) -25.536,5.318 ; -25.49,3.44 cw(c-24.891,3.44) C4.1@-25.314,3.864 ; -25.49,3.44 cw(c-24.891,3.44) C4.1@-25.314,3.864 ; -25.49,3.44 cw(c-24.891,3.44) C4.1@-25.314,3.864 ; -25.49,4.688 ccw(c-24.891,4.688) C4.1@-25.314,4.264 ; -25.49,4.688 ccw(c-24.891,4.688) C4.1@-25.314,4.264 ; -25.49,4.688 ccw(c-24.891,4.688) C4.1@-25.314,4.264 ; -23.051,1.356 ccw(c-23.051,1.653) U3.2@-22.841,1.443 ; -23.051,1.356 cw(c-23.051,1.059) U3.2@-22.841,1.269 ; -23.051,1.356 ccw(c-23.051,1.653) U3.2@-22.841,1.443 ; -23.051,1.356 cw(c-23.051,1.059) U3.2@-22.841,1.269 ; -23.051,1.356 ccw(c-23.051,1.653) U3.2@-22.841,1.443 ; -23.051,1.356 cw(c-23.051,1.059) U3.2@-22.841,1.269 ; -22.611,11.506 ccw(c-22.611,13.01) P0.6@-21.548,11.947 ; -22.611,11.506 cw(c-22.611,10.002) P0.6@-21.548,11.066 ; -22.611,11.506 ccw(c-22.611,13.01) P0.6@-21.548,11.947 ; -22.611,11.506 cw(c-22.611,10.002) P0.6@-21.548,11.066 ; -22.611,11.506 ccw(c-22.611,13.01) P0.6@-21.548,11.947 ; -22.611,11.506 cw(c-22.611,10.002) P0.6@-21.548,11.066 ; P0.6@-22.348,8.872 cw(c-21.566,8.711) -21.773,9.483 ; P0.6@-22.348,8.872 cw(c-21.566,8.711) -21.773,9.483 ; P0.6@-22.348,8.872 cw(c-21.566,8.711) -21.773,9.483 ; P0.6@-22.314,9.338 ccw(c-22.314,10.48) -21.506,9.672 ; P0.6@-22.314,9.338 ccw(c-22.314,10.48) -21.506,9.672 ; P0.6@-22.314,9.338 ccw(c-22.314,10.48) -21.506,9.672 ; P0.6@-22.307,8.83 ccw(c-22.467,9.612) -21.696,9.406 ; P0.6@-22.307,8.83 ccw(c-22.467,9.612) -21.696,9.406 ; P0.6@-22.307,8.83 ccw(c-22.467,9.612) -21.696,9.406 ; U3.2@-22.167,1.269 cw(c-21.957,1.059) -21.957,1.356 ; U3.2@-22.167,1.269 cw(c-21.957,1.059) -21.957,1.356 ; U3.2@-22.167,1.269 cw(c-21.957,1.059) -21.957,1.356 ; U3.2@-22.167,1.443 ccw(c-21.957,1.653) -21.957,1.356 ; U3.2@-22.167,1.443 ccw(c-21.957,1.653) -21.957,1.356 ; U3.2@-22.167,1.443 ccw(c-21.957,1.653) -21.957,1.356 ; -21.998,11.506 ccw(c-21.998,12.397) P0.6@-21.368,11.767 ; -21.998,11.506 cw(c-21.998,10.615) P0.6@-21.368,11.245 ; -21.998,11.506 ccw(c-21.998,12.397) P0.6@-21.368,11.767 ; -21.998,11.506 cw(c-21.998,10.615) P0.6@-21.368,11.245 ; -21.998,11.506 ccw(c-21.998,12.397) P0.6@-21.368,11.767 ; -21.998,11.506 cw(c-21.998,10.615) P0.6@-21.368,11.245 ; P0.6@-21.841,8.865 cw(c-20.699,8.865) -21.506,9.672 ; P0.6@-21.841,8.865 cw(c-20.699,8.865) -21.506,9.672 ; P0.6@-21.841,8.865 cw(c-20.699,8.865) -21.506,9.672 ; P0.6@-21.478,10.805 cw(c-22.02,10.071) -21.107,10.071 ; P0.6@-21.478,10.805 cw(c-22.02,10.071) -21.107,10.071 ; P0.6@-21.478,10.805 cw(c-22.02,10.071) -21.107,10.071 ; R8.1@-21.359,-1.953 cw(c-21.782,-2.376) -21.184,-2.376 ; R8.1@-21.359,-1.953 cw(c-21.782,-2.376) -21.184,-2.376 ; R8.1@-21.359,-1.953 cw(c-21.782,-2.376) -21.184,-2.376 ; R8.1@-21.359,-1.552 ccw(c-21.721,-1.19) -21.209,-1.19 ; R8.1@-21.359,-1.552 ccw(c-21.721,-1.19) -21.209,-1.19 ; R8.1@-21.359,-1.552 ccw(c-21.721,-1.19) -21.209,-1.19 ; -21.209,-1.068 ccw(c-20.524,-1.068) R8.1@-21.008,-1.552 ; -21.209,-1.068 ccw(c-20.524,-1.068) R8.1@-21.008,-1.552 ; -21.209,-1.068 ccw(c-20.524,-1.068) R8.1@-21.008,-1.552 ; -21.184,-2.376 cw(c-20.585,-2.376) R8.1@-21.008,-1.953 ; -21.184,-2.376 cw(c-20.585,-2.376) R8.1@-21.008,-1.953 ; -21.184,-2.376 cw(c-20.585,-2.376) R8.1@-21.008,-1.953 ; -21.107,10.071 cw(c-20.195,10.071) P0.6@-20.737,10.805 ; -21.107,10.071 cw(c-20.195,10.071) P0.6@-20.737,10.805 ; -21.107,10.071 cw(c-20.195,10.071) P0.6@-20.737,10.805 ; U1.23@-19.718,-9.16 ccw(c-19.858,-9.02) U1.23@-19.66,-9.02 ; U1.23@-19.718,-9.16 ccw(c-19.858,-9.02) U1.23@-19.66,-9.02 ; U1.23@-19.718,-9.16 ccw(c-19.858,-9.02) U1.23@-19.66,-9.02
  other v1: 6.299,-41.351 6.782,-39.116 -47.015,-39.065 -47.219,-34.747 -33.299,-32.08 -1.118,-31.928 6.985,-31.318 -15.265,-29.515 -35.992,-28.55 -25.095,-27.915 -45.491,-25.146 -6.401,-24.232 -38.506,-24.054 -21.209,-23.673 -17.577,-23.597 -14.986,-19.279 6.147,-14.554 6.147,-11.362 -47.092,-9.195 6.147,-8.17 -28.778,-7.493 -10.693,-5.944 6.147,-4.978 -47.142,-4.851 -14.707,-4.674 -24.028,-3.785 -40.335,-3.124 -4.775,1.499 -37.643,3.023 -29.743,3.277 3.277,3.277 -1.422,3.556 -43.967,4.064
NetC1_1: C1.1 U2.14 | length 9.5
  Bottom Layer w0.203: -35.936,-16.378 U2.14@-35.936,-15.084 ; U2.14@-36.013,-15.841 cw(c-36.198,-16.026) -35.936,-16.026 ; U2.14@-36.013,-15.841 cw(c-36.198,-16.026) -35.936,-16.026 ; U2.14@-36.013,-15.841 cw(c-36.198,-16.026) -35.936,-16.026 ; -35.936,-16.026 cw(c-35.675,-16.026) U2.14@-35.86,-15.841 ; -35.936,-16.026 cw(c-35.675,-16.026) U2.14@-35.86,-15.841 ; -35.936,-16.026 cw(c-35.675,-16.026) U2.14@-35.86,-15.841
  Bottom Layer w0.254: C1.1@-38.17,-17.909 cw(c-37.522,-17.723) -37.999,-17.247 ; C1.1@-38.164,-17.932 -38.164,-17.412 ; C1.1@-37.926,-17.839 cw(c-37.048,-17.588) -37.694,-16.942 ; -35.936,-16.378 -36.5,-16.942 -37.694,-16.942 ; C1.1@-38.313,-17.709 ccw(c-38.534,-17.412) -38.164,-17.412 ; C1.1@-38.313,-17.709 ccw(c-38.534,-17.412) -38.164,-17.412 ; C1.1@-38.313,-17.709 ccw(c-38.534,-17.412) -38.164,-17.412 ; -38.164,-17.412 ccw(c-37.794,-17.412) C1.1@-38.016,-17.709 ; -38.164,-17.412 ccw(c-37.794,-17.412) C1.1@-38.016,-17.709 ; -38.164,-17.412 ccw(c-37.794,-17.412) C1.1@-38.016,-17.709 ; -38.164,-17.412 -37.694,-16.942
NetC3_1: C3.1 U2.11 | length 7.6
  Bottom Layer w0.203: -33.986,-17.461 U2.11@-33.986,-15.084 ; -33.986,-17.125 ccw(c-32.783,-17.125) C3.1@-33.634,-17.976 ; -33.986,-16.635 ccw(c-32.293,-16.635) C3.1@-33.49,-17.832 ; -33.986,-16.144 ccw(c-31.802,-16.144) C3.1@-33.347,-17.689 ; U2.11@-34.063,-15.841 cw(c-34.248,-16.026) -33.986,-16.026 ; U2.11@-34.063,-15.841 cw(c-34.248,-16.026) -33.986,-16.026 ; U2.11@-34.063,-15.841 cw(c-34.248,-16.026) -33.986,-16.026 ; -33.986,-16.026 cw(c-33.725,-16.026) U2.11@-33.91,-15.841 ; -33.986,-16.026 cw(c-33.725,-16.026) U2.11@-33.91,-15.841 ; -33.986,-16.026 cw(c-33.725,-16.026) U2.11@-33.91,-15.841